# EAGLE board SlaveProtect_1Channel (EAGLE 9.2.2)
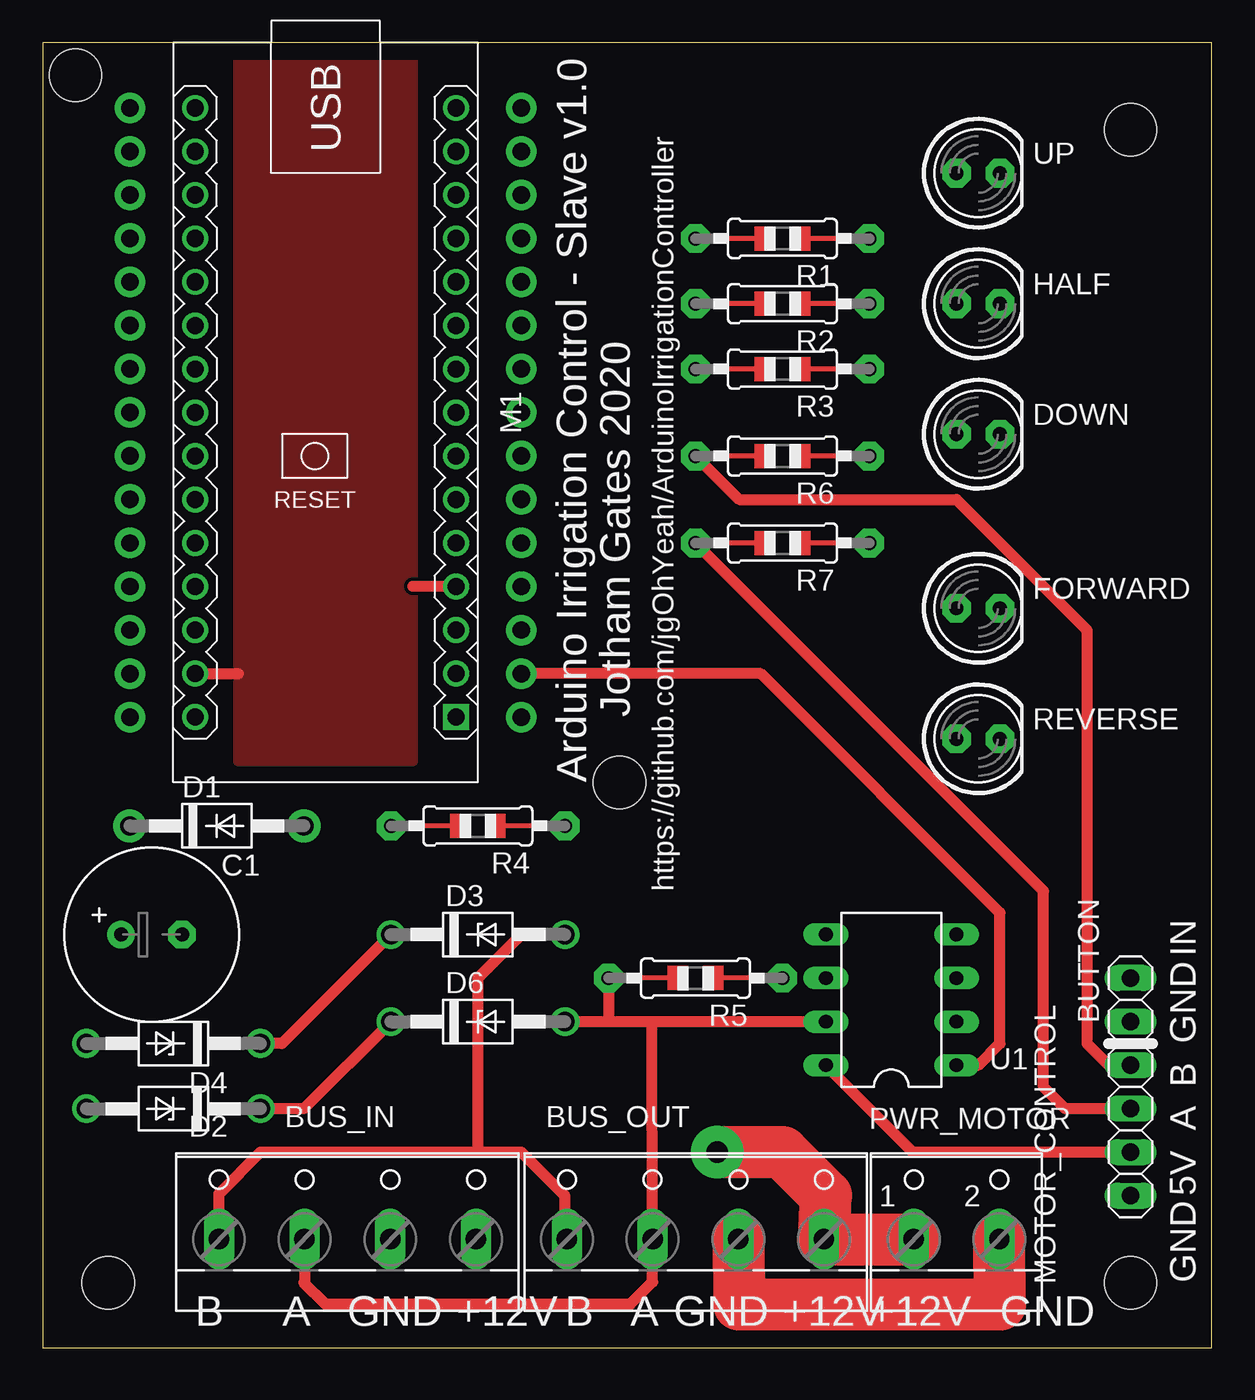
[diagram p0: board, top side]
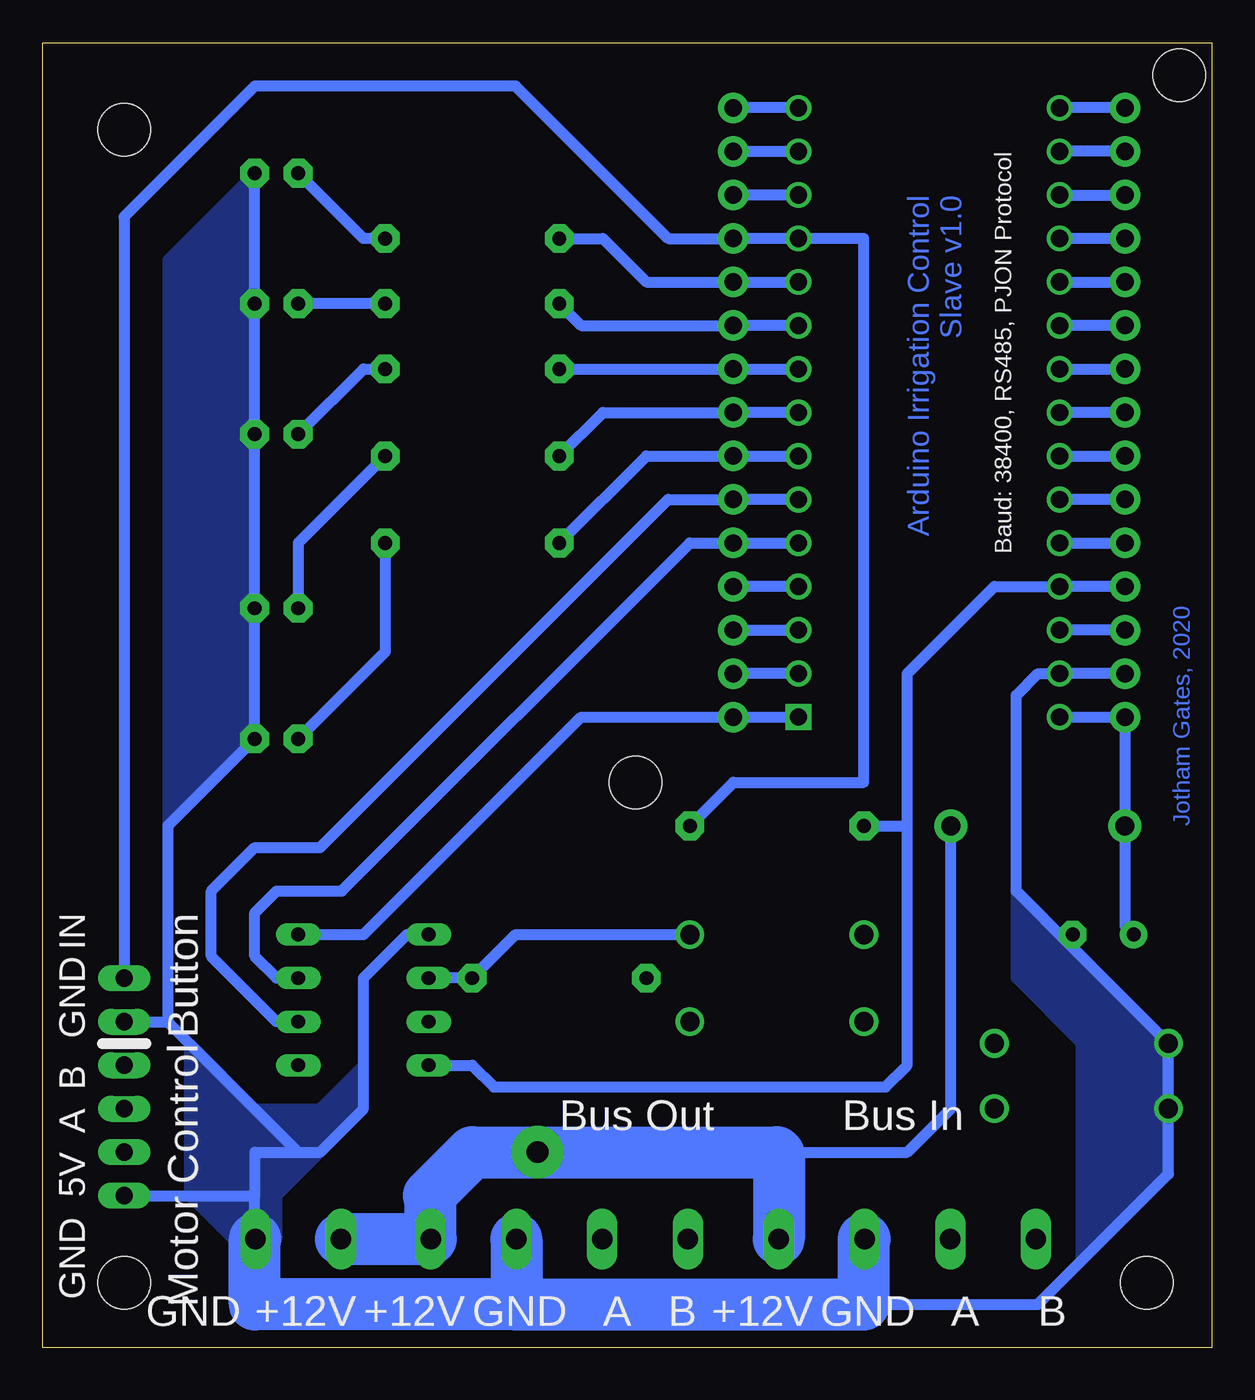
[diagram p1: board, bottom side, seen from below]

Size 68.25 x 76.19 mm. Coordinates in mm from the lower left corner, seen from the top.
Outline: 0,0 68.25,0 68.25,76.19 0,76.19 0,0
Copper layers (1*16): Top 0.035mm / dielectric 1.5mm / Bottom 0.035mm
Design rules "default": minimum track width 6mil, minimum drill 0.35mm, track to track 6mil, track to pad 6mil, pad to pad 6mil, via to via 6mil, smd to smd 6mil, copper to edge 40mil, drill to drill 6mil, minimum pad ring 10mil, minimum via ring 8mil, stop-mask expansion 4mil, vias tented up to drill 0mil, thermal gap 10mil
Net classes: 0 default: width 0.025 mm, clearance 0.205 mm
Holes 3.05 mm at 3.81,3.81 63.5,3.81 1.91,74.3 63.5,71.12 33.66,33.02

## Footprints (pad centres in the part's own frame; a part is rotated, then mirrored left to right if it is on the bottom)
W237-4 = drill 1.194 long: 1 -7.5,-1.27; 2 -2.5,-1.27; 3 2.5,-1.27; 4 7.5,-1.27
1X02 = drill 1.016 long: 1 -1.27,0; 2 1.27,0
E3,5-10 = drill 0.813 pad 1.6: + -1.778,0 | drill 0.813 pad 1.6 octagon: - 1.778,0
DO41-10 = drill 1.118 pad 1.93: A 5.08,0; C -5.08,0
DO41Z10 = drill 1.118: A 5.08,0; C -5.08,0
LED5MM = drill 0.813 pad 1.676 octagon: A -1.27,0; K 1.27,0
1X15-CB = drill 1.016 pad 1.778: 1 -17.78,0; 2 -15.24,0; 3 -12.7,0; 4 -10.16,0; 5 -7.62,0; 6 -5.08,0; 7 -2.54,0; 8 0,0; 9 2.54,0; 10 5.08,0; 11 7.62,0; 12 10.16,0; 13 12.7,0; 14 15.24,0; 15 17.78,0
ARDUINO-NANO-3.0 = drill 1 square: J1.1 17.78,7.62 | drill 1: J1.2 15.24,7.62; J1.3 12.7,7.62; J1.4 10.16,7.62; J1.5 7.62,7.62; J1.6 5.08,7.62; J1.7 2.54,7.62; J1.8 0,7.62; J1.9 -2.54,7.62; J1.10 -5.08,7.62; J1.11 -7.62,7.62; J1.12 -10.16,7.62; J1.13 -12.7,7.62; J1.14 -15.24,7.62; J1.15 -17.78,7.62; J2.1 17.78,-7.62; J2.2 15.24,-7.62; J2.3 12.7,-7.62; J2.4 10.16,-7.62; J2.5 7.62,-7.62; J2.6 5.08,-7.62; J2.7 2.54,-7.62; J2.8 0,-7.62; J2.9 -2.54,-7.62; J2.10 -5.08,-7.62; J2.11 -7.62,-7.62; J2.12 -10.16,-7.62; J2.13 -12.7,-7.62; J2.14 -15.24,-7.62; J2.15 -17.78,-7.62
W237-102 = drill 1.194 long: 1 -2.5,-1.27; 2 2.5,-1.27
0805-THM = drill 0.813 pad 1.676 octagon: 1 -5.08,0; 2 5.08,0
DIL08 = drill 0.813 long: 1 -3.81,-3.81; 2 -1.27,-3.81; 3 1.27,-3.81; 4 3.81,-3.81; 5 3.81,3.81; 6 1.27,3.81; 7 -1.27,3.81; 8 -3.81,3.81

## Placement (x,y rotation side)
BUS_IN  Main Bus  [W237-4]  17.78,7.62 0 top
BUS_OUT  Main Bus  [W237-4]  38.1,7.62 0 top
BUTTON  [1X02]  63.5,20.32 90 top
C1  [E3,5-10]  6.35,24.13 0 top
D1  1N4004  [DO41-10]  10.16,30.48 0 top
D2  1N4728  [DO41Z10]  7.62,13.97 180 top
D3  1N4728  [DO41Z10]  25.4,24.13 0 top
D4  1N4728  [DO41Z10]  7.62,17.78 180 top
D6  1N4728  [DO41Z10]  25.4,19.05 0 top
DOWN  [LED5MM]  54.61,53.34 0 top
FORWARD  [LED5MM]  54.61,43.18 0 top
HALF  [LED5MM]  54.61,60.96 0 top
JP1  [1X15-CB]  27.94,54.61 270 top
JP2  [1X15-CB]  5.08,54.61 90 top
M1  ARDUINO-NANO-3.0  [ARDUINO-NANO-3.0]  16.51,54.61 270 top
MOTOR_CONTROL  [1X02]  63.5,15.24 90 top
POWER_AUX  [1X02]  63.5,10.16 270 top
PWR_MOTOR  Motor Pwr  [W237-102]  53.34,7.62 0 top
R1  [0805-THM]  43.18,64.77 180 top
R2  [0805-THM]  43.18,60.96 180 top
R3  [0805-THM]  43.18,57.15 180 top
R4  [0805-THM]  25.4,30.48 180 top
R5  [0805-THM]  38.1,21.59 180 top
R6  [0805-THM]  43.18,52.07 180 top
R7  [0805-THM]  43.18,46.99 180 top
REVERSE  [LED5MM]  54.61,35.56 0 top
U1  DS3956N  [DIL08]  49.53,20.32 90 top
UP  [LED5MM]  54.61,68.58 0 top

## Library data of the parts
BUS_IN BUS_OUT = con-wago-500; OC_FARNELL: unknown; OC_NEWARK: unknown
BUTTON MOTOR_CONTROL POWER_AUX = pinhead
C1 D1 DOWN FORWARD HALF JP1 JP2 R1-R7 REVERSE UP = adafruit
D2-D4 D6 = diode
M1 = diy-modules
PWR_MOTOR = con-wago-500; MPN: 237-102; OC_FARNELL: unknown; OC_NEWARK: 70K9898
U1 = DS3695N_RS485_Transceiver

## Nets
+5V: JP2.4 M1.J2.4 POWER_AUX.1 R4.2 U1.8
+12V: BUS_IN.4 BUS_OUT.4 D1.A PWR_MOTOR.1
GND: BUS_IN.3 BUS_OUT.3 BUTTON.1 C1.- D2.A D4.A DOWN.K FORWARD.K HALF.K JP2.2 M1.J2.2 POWER_AUX.2 PWR_MOTOR.2 REVERSE.K U1.5 UP.K
N$1: R1.1 UP.A
N$2: HALF.A R2.1
N$3: DOWN.A R3.1
N$4: BUTTON.2 JP1.4 M1.J1.12 R4.1
N$5: BUS_IN.1 BUS_OUT.1 D3.A R5.1 U1.6
N$6: BUS_IN.2 BUS_OUT.2 D6.A R5.2 U1.7
N$7: JP1.10 M1.J1.6 U1.2
N$8: JP1.11 M1.J1.5 U1.3
N$9: JP1.14 M1.J1.2 U1.1
N$10: JP1.15 M1.J1.1 U1.4
N$11: JP1.7 M1.J1.9 R3.2
N$12: JP1.6 M1.J1.10 R2.2
N$13: JP1.5 M1.J1.11 R1.2
N$14: JP1.8 M1.J1.8 MOTOR_CONTROL.2 R6.2
N$15: JP1.9 M1.J1.7 MOTOR_CONTROL.1 R7.2
N$16: C1.+ D1.C JP2.1 M1.J2.1
N$18: FORWARD.A R6.1
N$19: R7.1 REVERSE.A
N$20: D2.C D6.C
N$21: D3.C D4.C
N$22: JP2.3 M1.J2.3
N$23: JP2.5 M1.J2.5
N$24: JP2.6 M1.J2.6
N$25: JP2.7 M1.J2.7
N$26: JP2.8 M1.J2.8
N$27: JP2.9 M1.J2.9
N$28: JP2.10 M1.J2.10
N$29: JP2.11 M1.J2.11
N$30: JP2.12 M1.J2.12
N$31: JP2.13 M1.J2.13
N$32: JP2.14 M1.J2.14
N$33: JP2.15 M1.J2.15
N$34: JP1.1 M1.J1.15
N$35: JP1.2 M1.J1.14
N$36: JP1.3 M1.J1.13
N$37: JP1.12 M1.J1.4
N$38: JP1.13 M1.J1.3

## Tracks (layer width: path | path; a pad name or v marks a point on that pad's centre or on a via)
+5V
  Top 0.635: POWER_AUX.1 50.8,11.43 U1.8
  Bottom 0.635: U1.8 43.18,16.51 41.91,15.24 19.05,15.24 17.78,16.51 17.78,30.48 | 17.78,30.48 17.78,39.37 12.7,44.45 M1.J2.4 JP2.4 | R4.2 17.78,30.48
+12V  (via drill 1.27 pad 3.05)
  Top 3.048: PWR_MOTOR.1 BUS_OUT.4 45.72,8.89 43.18,11.43 v39.37,11.43
  Bottom 0.635: 25.4,11.43 17.78,11.43 15.24,13.97 D1.A
  Bottom 3.048: PWR_MOTOR.1 BUS_OUT.4 45.6,8.77 45.72,8.89 43.18,11.43 v39.37,11.43 25.4,11.43 25.28,11.31 BUS_IN.4
GND
  Top 0.635: M1.J2.2 11.43,39.37
  Top 3.048: BUS_OUT.3 40.64,2.54 55.88,2.54 PWR_MOTOR.2
  Bottom 0.635: JP2.2 M1.J2.2 10.16,39.37 11.43,38.1 11.43,26.67 8.13,23.37 | 20.32,2.54 10.16,2.54 2.54,10.16 D2.A D4.A 8.13,23.37 | UP.K HALF.K DOWN.K FORWARD.K REVERSE.K 60.96,30.48 60.96,19.05 | 55.88,8.89 55.88,11.43 53.34,11.43 | U1.5 46.99,24.13 49.53,21.59 49.53,13.97 52.07,11.43 53.34,11.43 | POWER_AUX.2 55.88,8.89 | 60.96,19.05 53.34,11.43 | PWR_MOTOR.2 55.88,6.39 55.88,8.89 | BUTTON.1 60.96,19.05 | C1.- 8.13,23.37
  Bottom 3.048: BUS_OUT.3 40.6,2.58 | 40.6,2.58 40.64,2.54 55.88,2.54 55.88,6.35 PWR_MOTOR.2 | 40.6,2.58 40.56,2.54 20.32,2.54 20.32,6.35 BUS_IN.3
  pour Bottom (no thermals): 59.69,8.89 59.69,17.78 55.88,13.97 49.53,13.97 54.61,8.89 54.61,6.35 57.15,6.35
  pour Bottom: 52.07,13.97 49.53,13.97 49.53,16.51
  pour Bottom (no thermals): 7.62,5.08 7.62,17.78 11.43,21.59 11.43,26.67 2.54,17.78 2.54,10.16
  pour Bottom (no thermals): 55.88,68.58 60.96,63.5 60.96,30.48 55.88,35.56
  pour Top: 11.43,34.29 21.59,34.29 21.59,76.2 12.7,76.2 11.43,76.2
N$1
  Bottom 0.635: UP.A 49.53,64.77 R1.1
N$2
  Bottom 0.635: R2.1 HALF.A
N$3
  Bottom 0.635: DOWN.A 49.53,57.15 R3.1
N$4
  Bottom 0.635: R4.1 27.94,33.02 20.32,33.02 20.32,64.77 M1.J1.12 JP1.4 31.75,64.77 40.64,73.66 55.88,73.66 63.5,66.04 BUTTON.2
N$5
  Top 0.635: BUS_IN.1 10.28,9.01 12.7,11.43 25.4,11.43 | BUS_OUT.1 30.48,6.47 30.48,8.89 27.94,11.43 25.4,11.43 | 25.4,11.43 25.4,21.59 27.94,24.13 D3.A
  Bottom 0.635: D3.A 40.64,24.13 R5.1 U1.6
N$6
  Top 0.635: BUS_IN.2 15.28,3.85 15.24,3.81 16.51,2.54 34.29,2.54 35.6,3.85 BUS_OUT.2 35.56,19.05 | U1.7 35.56,19.05 | 35.56,19.05 33.02,19.05 | 33.02,19.05 D6.A | R5.2 33.02,19.05
N$7
  Bottom 0.635: U1.2 54.61,19.05 58.42,22.86 58.42,26.67 55.88,29.21 52.07,29.21 31.75,49.53 JP1.10 M1.J1.6
N$8
  Bottom 0.635: U1.3 54.61,21.59 55.88,22.86 55.88,25.4 54.61,26.67 50.8,26.67 30.48,46.99 JP1.11 M1.J1.5
N$9
  Top 0.635: U1.1 54.61,16.51 55.88,17.78 55.88,25.4 41.91,39.37 JP1.14
  Bottom 0.635: M1.J1.2 JP1.14
N$10
  Bottom 0.635: U1.4 49.53,24.13 36.83,36.83 JP1.15 M1.J1.1
N$11
  Bottom 0.635: R3.2 JP1.7 M1.J1.9
N$12
  Bottom 0.635: R2.2 36.83,59.69 JP1.6 M1.J1.10
N$13
  Bottom 0.635: R1.2 35.56,64.77 33.02,62.23 JP1.5 M1.J1.11
N$14
  Top 0.635: R6.2 40.64,49.53 53.34,49.53 60.96,41.91 60.96,17.78 62.23,16.51 MOTOR_CONTROL.2
  Bottom 0.635: R6.2 35.56,54.61 JP1.8 M1.J1.8
N$15
  Top 0.635: MOTOR_CONTROL.1 59.69,13.97 58.42,15.24 58.42,26.67 R7.2
  Bottom 0.635: R7.2 33.02,52.07 JP1.9 M1.J1.7
N$16
  Bottom 0.635: M1.J2.1 JP2.1 D1.C 5.08,24.64 C1.+
N$18
  Bottom 0.635: R6.1 53.34,46.99 FORWARD.A
N$19
  Bottom 0.635: R7.1 48.26,40.64 REVERSE.A
N$20
  Top 0.635: D6.C 15.24,13.97 D2.C
N$21
  Top 0.635: D3.C 13.97,17.78 D4.C
N$22
  Bottom 0.635: JP2.3 M1.J2.3
N$23
  Bottom 0.635: M1.J2.5 JP2.5
N$24
  Bottom 0.635: JP2.6 M1.J2.6
N$25
  Bottom 0.635: M1.J2.7 JP2.7
N$26
  Bottom 0.635: JP2.8 M1.J2.8
N$27
  Bottom 0.635: M1.J2.9 JP2.9
N$28
  Bottom 0.635: JP2.10 M1.J2.10
N$29
  Bottom 0.635: M1.J2.11 JP2.11
N$30
  Bottom 0.635: JP2.12 M1.J2.12
N$31
  Bottom 0.635: M1.J2.13 JP2.13
N$32
  Bottom 0.635: JP2.14 M1.J2.14
N$33
  Bottom 0.635: JP2.15 M1.J2.15
N$34
  Bottom 0.635: M1.J1.15 JP1.1
N$35
  Bottom 0.635: JP1.2 M1.J1.14
N$36
  Bottom 0.635: M1.J1.13 JP1.3
N$37
  Top 0.635: M1.J1.4 21.59,44.45
  Bottom 0.635: M1.J1.4 JP1.12
N$38
  Bottom 0.635: JP1.13 M1.J1.3

## Text on the board
Bottom: Arduino Irrigation Control / Slave v1.0 | Jotham Gates, 2020
tPlace: Jotham Gates 2020 | Arduino Irrigation Control - Slave v1.0 | https://github.com/jgOhYeah/ArduinoIrrigationController | IN | GND | B | A | 5V | GND | B | A | GND | +12V | B | A | GND | +12V | +12V | GND
bPlace: Baud: 38400, RS485, PJON Protocol | Button | IN | GND | Motor Control | B | A | Bus In | Bus Out | 5V | GND | B | A | GND | +12V | B | A | GND | +12V | +12V | GND